# Altium PCB candy-v1.0-product.PcbDoc (part 1 of 2)
Units mil, origin at the board's own origin, x right, y up, seen from the top; angles counter-clockwise.
Board outline 3100 x 1100 mil, 4 copper layers (Layer 1, Layer 2, Layer 3, Layer 4), stack 22.378 mil thick; 96 components, 103 nets, 428 pads, 133 vias.
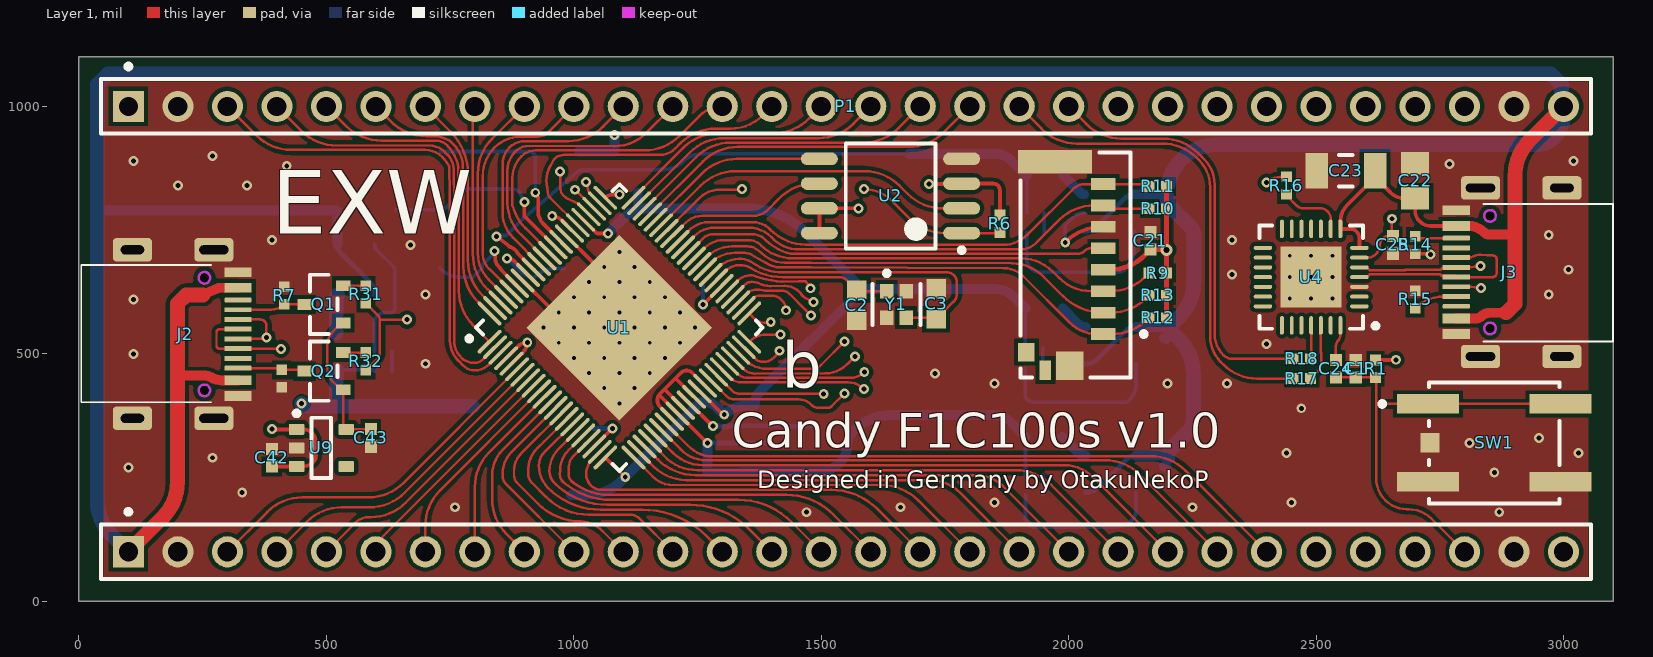
[diagram p0: Layer 1 view]
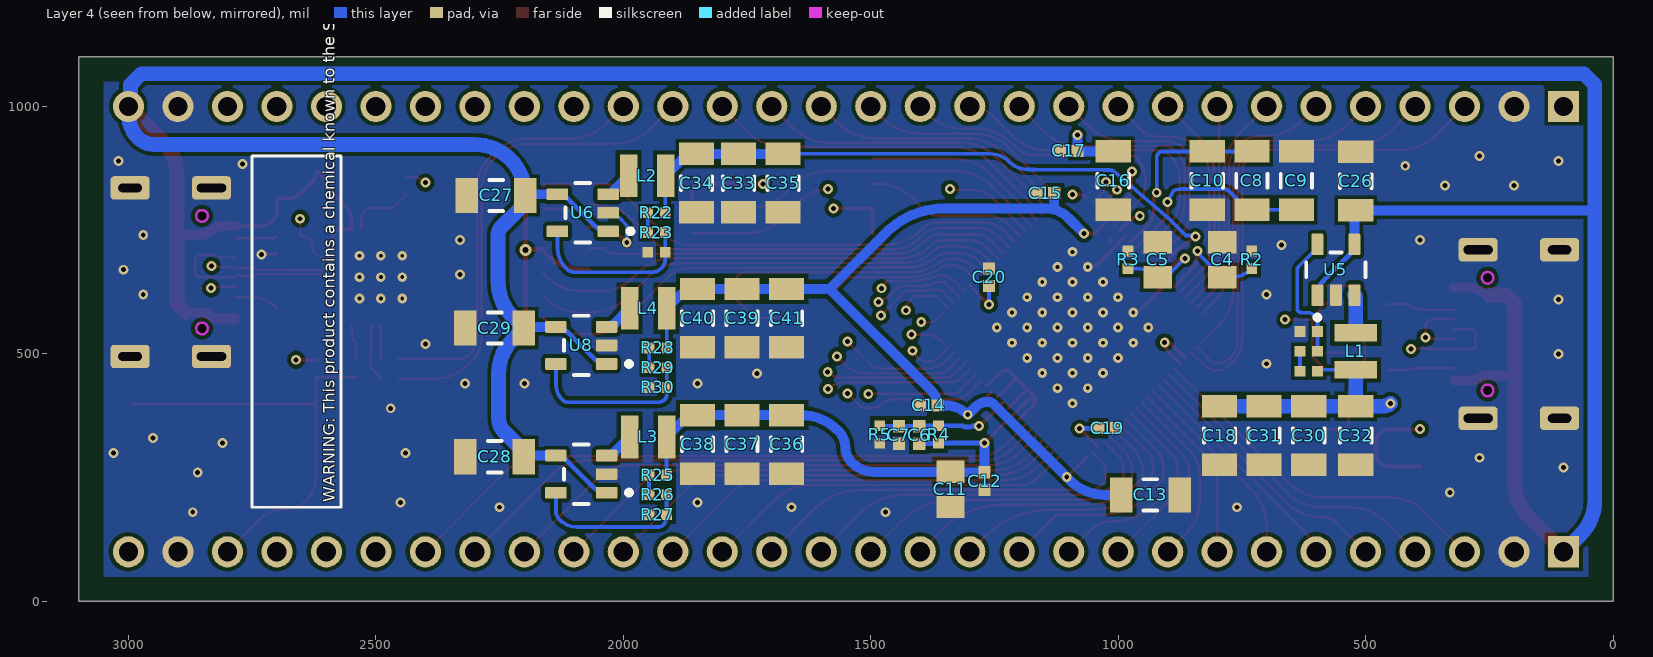
[diagram p1: Layer 4 view, seen from below]
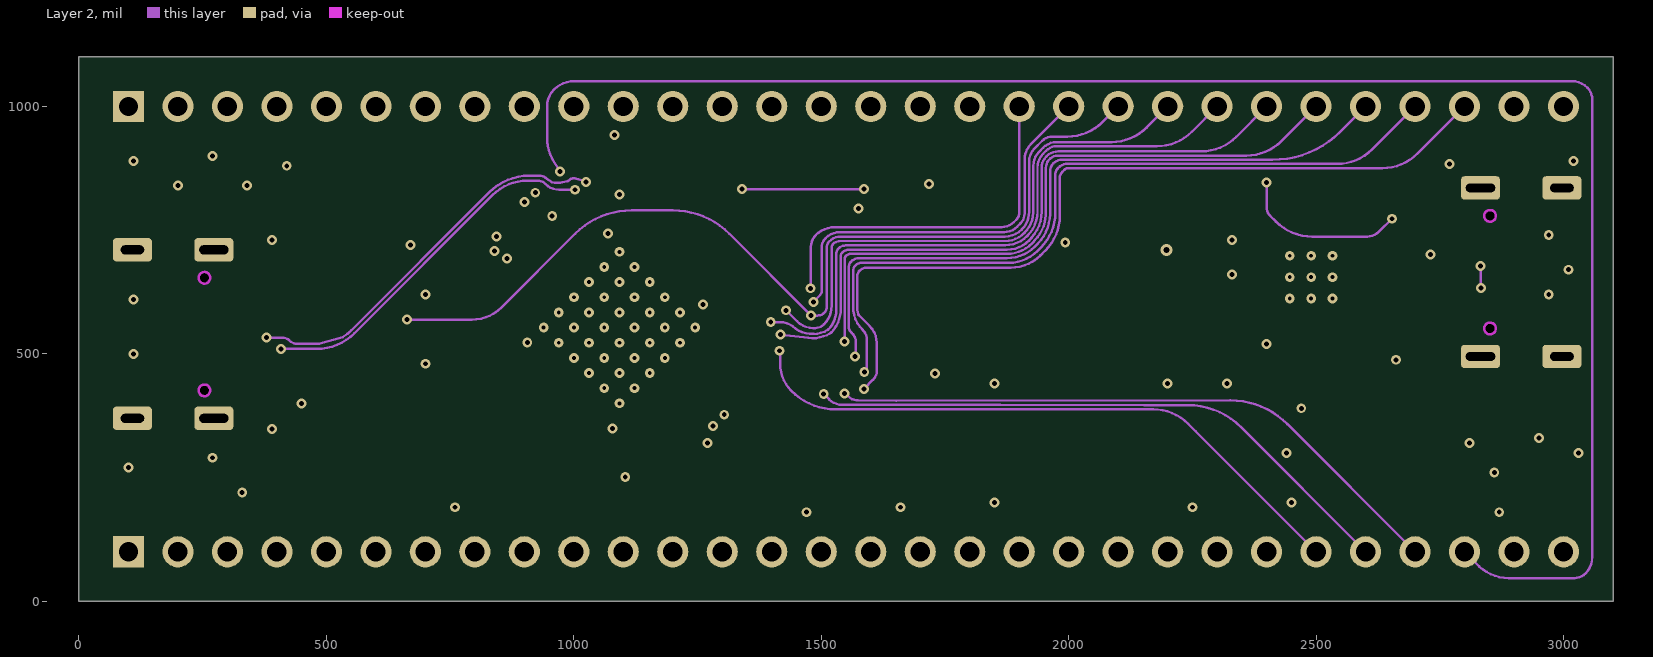
[diagram p2: Layer 2]
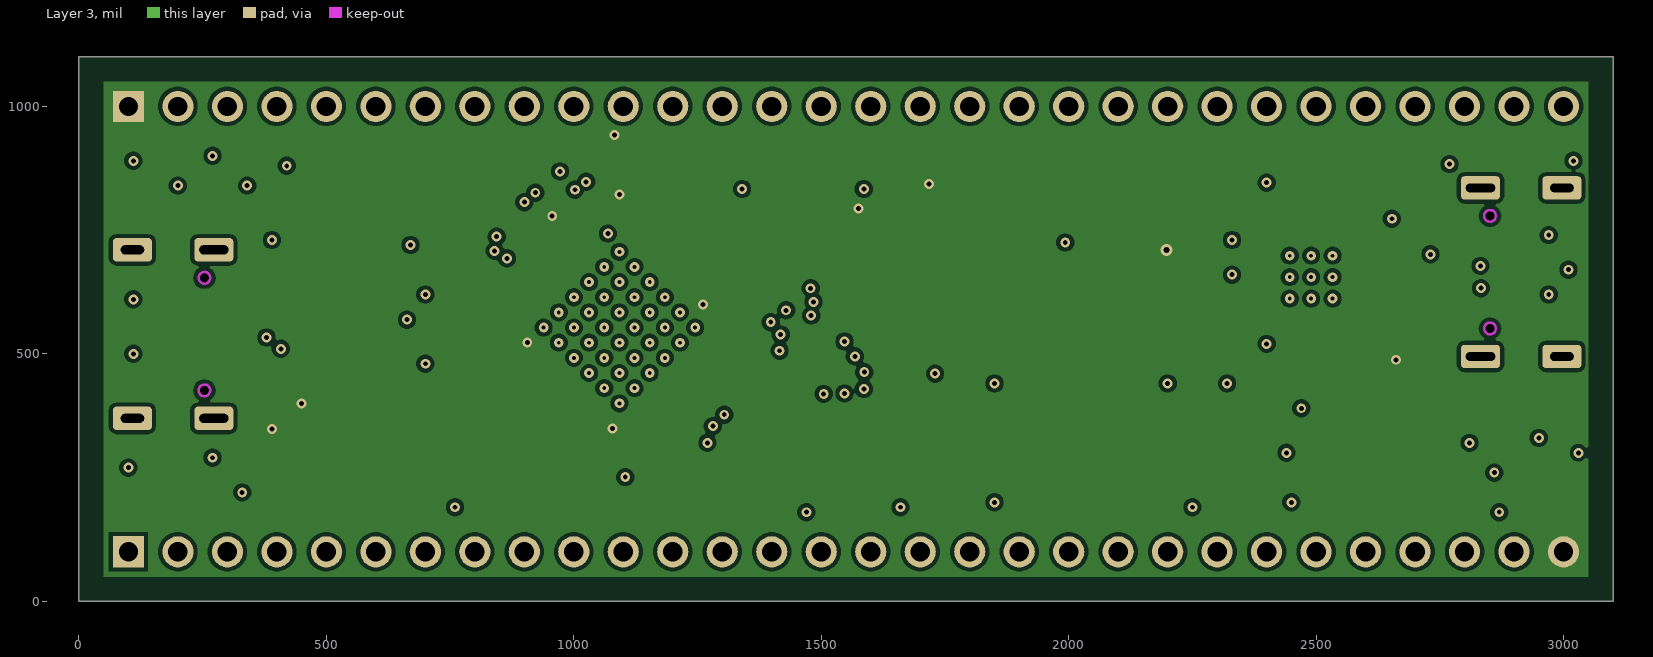
[diagram p3: Layer 3]
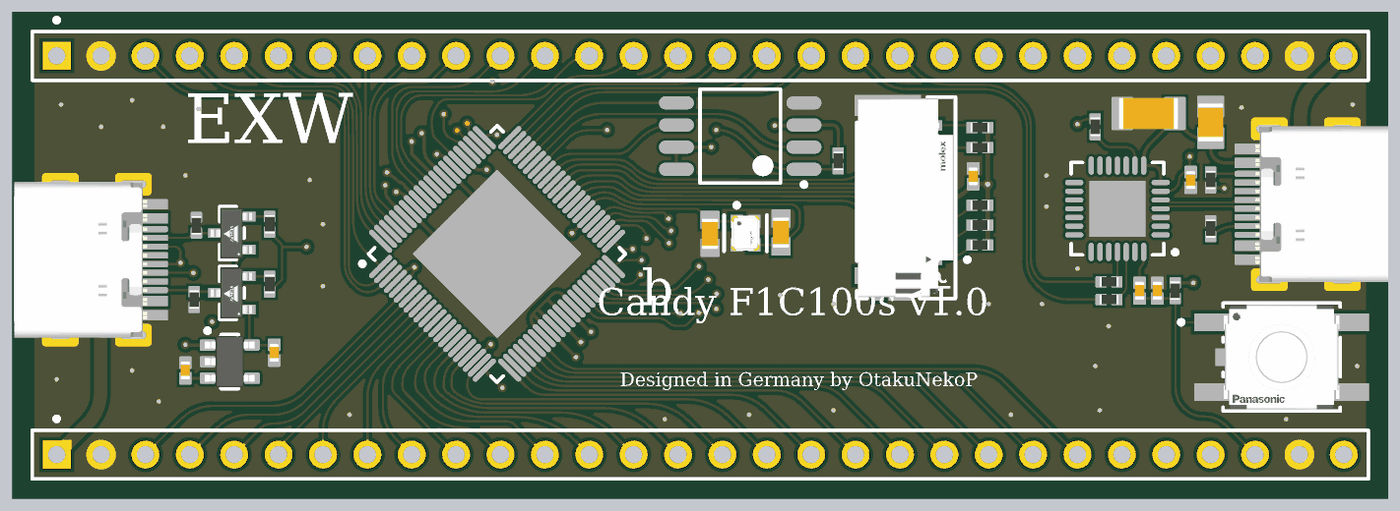
[diagram p5: 3D render of the assembled board from above, using the file's embedded part models]
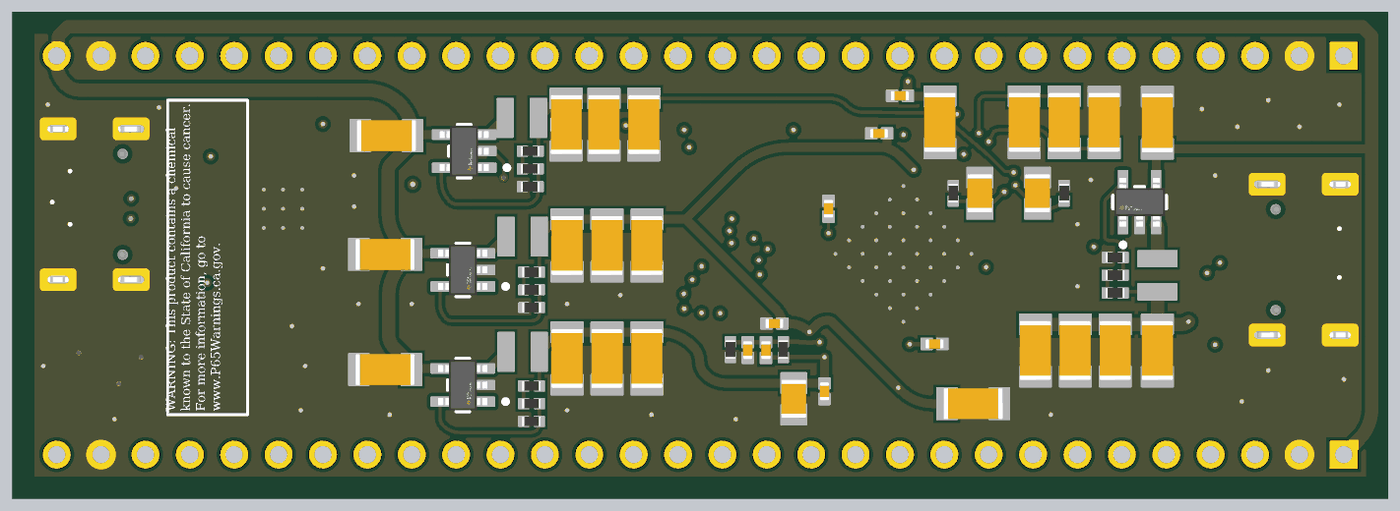
[diagram p6: 3D render of the assembled board from below, using the file's embedded part models]

## Layer stack, top to bottom
Top Solder: solder mask 0.4, Solder Resist, Dk 3.5
Layer 1: signal copper 1.4
Dielectric 2: prepreg 2.8, FR-4, Dk 4.1
Layer 2: signal copper 0.689
Dielectric 1: dielectric 12.6, FR-4, Dk 4.8
Layer 3: signal copper 0.689
Dielectric 3: prepreg 2.8, FR-4, Dk 4.1
Layer 4: signal copper 1.4
Bottom Solder: solder mask 0.4, Solder Resist, Dk 3.5

## Board outline
0,0 0,1100 3100,1100 3100,0

## Design rules (kind name [scope] priority, off if disabled: settings)
Clearance [All] p1: gap=7.87 ignorepadtopadclearanceinfootprint=TRUE except(3.5: Arc-Arc Arc-Track Track-Track; 10: Arc-Via Track-Via; 13: Arc-Hole Track-Hole SMDPad-Hole THPad-Hole Via-Hole Fill-Hole Poly-Hole Region-Hole)
DiffPairsRouting [All] p1: maxlimit=10 minlimit=3.5 mostfreqgap=10 toplayer_minwidth=3.5 toplayer_maxwidth=15 toplayer_prefwidth=15 midlayer1_minwidth=3.5 midlayer1_maxwidth=15 midlayer1_prefwidth=15 midlayer2_minwidth=3.5 midlayer2_maxwidth=15 midlayer2_prefwidth=15 bottomlayer_minwidth=3.5 bottomlayer_maxwidth=15 bottomlayer_prefwidth=15 maxuncoupledlength=500
HoleSize [All] p1: absolutevalues=TRUE maxlimit=248.03 minlimit=7.87 maxpercent=80.000 minpercent=20.000
HoleToHoleClearance [All] p1: gap=19.68 allowstackedmicrovias=TRUE
MinimumSolderMaskSliver [All] p1: minsoldermaskwidth=7.87
PasteMaskExpansion [All] p1: expansion=1.97
PlaneClearance [All] p1: clearance=7.87
PlaneConnect [All] p1: planeconnectstyle=Direct reliefexpansion=20 reliefentries=4 reliefconductorwidth=10 reliefairgap=10
PolygonConnect [All] p1: connectstyle=Direct reliefconductorwidth=10 reliefentries=4 polygonreliefangle="90 Angle" airgapwidth=10
RoutingCorners [All] p1: cornerstyle=Round minsetback=100 maxsetback=100
RoutingVias [All] p1: holewidth=10 width=20 viastyle="Through Hole" minholewidth=7.87 minwidth=15.75 maxholewidth=248.03 maxwidth=300
SilkToSilkClearance [All] p1: silktosilkclearance=0
SilkToSolderMaskClearance [IsPad] p1: minsilkscreentomaskgap=5.91 clearancetoexposedcopper=TRUE
SolderMaskExpansion [All] p1: expansion=1.97 istentingtop=FALSE
Width [All] p1: maxlimit=200 minlimit=3.5 preferedwidth=10
20 further rules are at their usual default settings.

## Classes and differential pairs
differential pair DBGUSB: +DBGUSB_P -DBGUSB_N
differential pair AWUSB: +AWUSB_P -AWUSB_N

## Components (designator, comment, footprint, x,y, rotation, side; value= is the part's Value field where it differs from the comment)
C1 "" C0402 2580,470 r90 top value=100n
C2 "" C0603 1572,598.35 r270 top value=18p
C3 "" C0603 1732,601.35 r90 top value=18p
C4 "" C0805 790,690 r90 bottom value=1u
C5 "" C0805 920,690 r90 bottom value=1u
C6 "" C0402 1402,336 r90 bottom value=100n
C7 "" C0402 1443,336 r270 bottom value=100n
C8 "" C1206 730,850 r270 bottom value=10u
C9 "" C1206 640,850 r90 bottom value=10u
C10 "" C1206 820,850 r270 bottom value=10u
C11 "" C0805 1339,226 r270 bottom value=1u
C12 "" C0402 1270,243 r270 bottom value=100n
C13 "" C1206 935,215 r180 bottom value=10u
C14 "" C0402 1383,396 r0 bottom value=100n
C15 "" C0402 1147,825 r0 bottom value=100n
C16 "" C1206 1010,850 r270 bottom value=10u
C17 "" C0402 1100,910 r0 bottom value=100n
C18 "" C1206 795,335 r270 bottom value=10u
C19 "" C0402 1022,350 r180 bottom value=100n
C20 "" C0402 1261,655 r90 bottom value=100n
C21 "" C0402 2165,728.15 r90 top value=100n
C22 "" C0805 2700,850 r90 top value=100n
C23 "" C1206 2560,870 r180 top value=4u7
C24 "" C0402 2540,470 r270 top value=100n
C25 "" C0402 2655,720 r270 top value=100n
C26 "" C1206 520,849.06 r90 bottom value=4u7
C27 "" C1206 2257,820 r0 bottom value=4u7
C28 "" C1206 2260,292 r0 bottom value=4u7
C29 "" C1206 2260,552 r0 bottom value=4u7
C30 "" C1206 615,335 r270 bottom value=10u
C31 "" C1206 705,335 r270 bottom value=10u
C32 "" C1206 520,335 r270 bottom value=10u
C33 "" C1206 1767,845 r270 bottom value=10u
C34 "" C1206 1852,845 r270 bottom value=10u
C35 "" C1206 1677,845 r270 bottom value=10u
C36 "" C1206 1670,317 r270 bottom value=10u
C37 "" C1206 1760,317 r270 bottom value=10u
C38 "" C1206 1850,317 r270 bottom value=10u
C39 "" C1206 1760,572 r270 bottom value=22u
C40 "" C1206 1850,572 r270 bottom value=22u
C41 "" C1206 1670,572 r270 bottom value=22u
C42 "" C0402 390,290 r90 top value=100n
C43 "" C0402 590,330 r270 top value=100n
J1 "" FP-47309-3351-MFG 2013.9,679.76 r270 top
J2 "" Type_C_16P 214.82,540 r180 top locked
J3 "" Type_C_16P 2890,665 r0 top locked
L1 "" INDC2520X10N 520,505 r270 bottom
L2 "" INDC2520X10N 1952,860 r180 bottom
L3 "" INDC2520X10N 1950,332 r180 bottom
L4 "" INDC2520X10N 1950,592 r180 bottom
P1 "" HDR1X30 100,1000 r0 top locked
P2 "" HDR1X30 100,100 r0 top locked
Q1 "" FP-S-03946-MFG 494.82,600 r180 top
Q2 "" FP-S-03946-MFG 494.82,465 r180 top
R1 "" R0402 2620,470 r90 top value=47k
R2 "" R0402 730,690 r270 bottom value=200k
R3 "" R0402 980,690 r270 bottom value=200k
R4 "" R0402 1363,337 r90 bottom value=2k0
R5 "" R0402 1482,337 r270 bottom value=2k0
R6 "" R0402 1861,763 r90 top value=10k
R7 "" R0402 414.82,617.72 r90 top value=5k1
R8 "" R0402 409.82,450 r270 top value=5k1
R9 "" R0402 2180,663.15 r0 top value=47k
R10 "" R0402 2180,793.15 r0 top value=47k
R11 "" R0402 2180,838.15 r0 top value=47k
R12 "" R0402 2180,573.15 r0 top value=47k
R13 "" R0402 2180,618.15 r0 top value=47k
R14 "" R0402 2700,720 r270 top value=5k1
R15 "" R0402 2700,610 r90 top value=5k1
R16 "" R0402 2440,840 r270 top value=4k7
R17 "" R0402 2471,450 r180 top value=10k
R18 "" R0402 2471,490 r180 top value=10k
R19 "" R0402 615,465 r180 bottom value=430k
R20 "" R0402 615,505 r0 bottom value=12k
R21 "" R0402 615,545 r180 bottom value=100k
R22 "" R0402 1933,785 r180 bottom value=360k
R23 "" R0402 1933,745 r0 bottom value=5k1
R24 "" R0402 1933,705 r180 bottom value=100k
R25 "" R0402 1930.28,255 r180 bottom value=300k
R26 "" R0402 1930.28,215 r0 bottom value=16k
R27 "" R0402 1930.28,175 r180 bottom value=100k
R28 "" R0402 1930,512 r180 bottom value=82k
R29 "" R0402 1930,472 r0 bottom value=1k3
R30 "" R0402 1930,432 r180 bottom value=100k
R31 "" R0402 579.82,620 r90 top value=200R
R32 "" R0402 579.82,485 r90 top value=200R
SW1 "" FP-EVQ-Q2H03W-MFG 2860,320 r0 top
U1 "" QFN40P1000X1000X90_HS-89M 1092.16,553.08 r45 top locked
U2 "" WINB-W25Q16DVSSIG-8_M 1640,819 r180 top
U4 "" SLAB-QFN-28-3125x3125TP_M 2490,655 r180 top
U5 "" FP-DBV0005A-MFG 560,670 r90 bottom
U6 "" FP-DBV0005A-MFG 2082,785 r0 bottom
U7 "" FP-DBV0005A-MFG 2085,257 r0 bottom
U8 "" FP-DBV0005A-MFG 2085,517 r0 bottom
U9 "" DBV0005A_L 490,309.82 r0 top
Y1 "" FP-XRCGB_F_N-MFG 1652,599.85 r270 top

## Footprints (in the part's own frame and the unit in brackets; to place one, negate y for a bottom-side part, rotate by r counter-clockwise, add the part's x,y. Pads: shape width x height; smd on the part's side, far side on the other; paste and mask are expansions set on the pad)
C0402 [mm]
  rect 0.62x0.62 smd: 1(-0.45,0) 2(0.45,0)
  body extent -0.53,-0.28 0.53,0.28, height 0.6
C0603 [mm]
  rect 0.95x1 smd: 1(-0.8,0) 2(0.8,0)
  body extent -0.87,-0.48 0.87,0.48, height 0.7
C0805 [mm]
  rect 1.15x1.45 smd: 1(-0.9,0) 2(0.9,0)
  body extent -1.1,-0.72 1.1,0.72, height 0.9
C1206 [mm]
  rect 1.15x1.8 smd: 1(-1.5,0) 2(1.5,0)
  silkscreen extent -0.35,-0.8 0.35,0.8, body extent -1.7,-0.9 1.7,0.9, height 1
DBV0005A_L [mm] "SOT23, 5-Leads, Body 3.05x1.75mm, Pitch 0.95mm, IPC High Density"
  rrect18% 0.8x0.55 smd: 1(-1.275,0.95) 2(-1.275,0) 3(-1.275,-0.95) 4(1.275,-0.95) 5(1.275,0.95)
  silkscreen extent -1.4,-1.55 0.5,1.9, body extent -1.42,-1.46 1.42,1.46, height 1.08
FP-47309-3351-MFG [mm]
  rect 1.2x3.79 smd paste+0 mask+0: G1(-5.3,-1.055)
  rect 1.45x1.4 smd paste+0 mask+0: G2(5.175,-0.3)
  rect 1x0.6 smd paste+0 mask+0: G3(5.4,-1.55)
  rect 0.95x0.85 smd paste+0 mask+0: G4(4.475,-2.525)
  rect 0.6x1.25 smd paste+0 mask+0: P1(3.55,1.425) P2(2.45,1.425) P3(1.35,1.425) P4(0.25,1.425) P5(-0.85,1.425) P6(-1.95,1.425) P7(-3.05,1.425) P8(-4.15,1.425)
  silkscreen extent -5.77,-2.83 5.77,3.63, body extent -6,-3.05 6,2.93, height 0.25
FP-DBV0005A-MFG [mm]
  rrect17% 1.1x0.6 smd paste+0 mask+0: 1(-1.3,0.95) 2(-1.3,0) 3(-1.3,-0.95) 4(1.3,-0.95) 5(1.3,0.95)
  silkscreen extent -2.57,-1.53 0.87,1.53, body extent -1.4,-1.45 1.4,1.45, height 1.45
FP-EVQ-Q2H03W-MFG [mm]
  rect 1x1 smd paste+0 mask+0: 1(-3.3,0)
  rect 3.2x1 smd paste+0 mask+0: A(-3.4,2) A'(3.4,2) B(-3.4,-2) B'(3.4,-2)
  silkscreen extent -5.87,-3.1 3.35,3.1, body extent -5.1,-3.2 5.1,3.2, height 0.25
FP-S-03946-MFG [mil]
  rect 29x22 smd paste+0 mask+0: 1(-39,37.5) 2(-39,-37.5) 3(39,0)
  silkscreen extent -28,-60 28,60, body extent -57,-64 57,64, height 10
FP-XRCGB_F_N-MFG [mm]
  rect 0.75x0.7 smd paste+0 mask+0: 1(-0.675,-0.5) 2(0.675,-0.5) 3(0.675,0.5) 4(-0.675,0.5)
  silkscreen extent -1.72,-1.22 1.05,1.22, body extent -1.15,-0.95 1.15,0.95, height 0.25
HDR1X30 [mm] "Connector; Header; 30 Position"
  rect 1.6x1.6 hole 0.99: 1(0,0)
  round 1.6 hole 0.99: 2(2.54,0) 3(5.08,0) 4(7.62,0) 5(10.16,0) 6(12.7,0) 7(15.24,0) 8(17.78,0) 9(20.32,0) 10(22.86,0) 11(25.4,0) 12(27.94,0) 13(30.48,0) 14(33.02,0) 15(35.56,0) 16(38.1,0) 17(40.64,0) 18(43.18,0) 19(45.72,0) 20(48.26,0) 21(50.8,0) 22(53.34,0) 23(55.88,0) 24(58.42,0) 25(60.96,0) 26(63.5,0) 27(66.04,0) 28(68.58,0) 29(71.12,0) 30(73.66,0)
  silkscreen extent -1.4,-1.4 75.06,2.17
INDC2520X10N [mm] "Chip Inductor, 2-Leads, Body 2.50x2.00mm, IPC Medium Density"
  rect 0.9x2.2 smd: 1(-0.95,0) 2(0.95,0)
  body extent -1.35,-1.1 1.35,1.1, height 1
QFN40P1000X1000X90_HS-89M [mm] "QFN, 88-Leads, Body 10.00x10.00mm, Pitch 0.40mm, Thermal Pad 6.74x6.74mm, IPC Low Density"
  oval 1.65x0.2 smd: 1(-5.225,4.2) 2(-5.225,3.8) 3(-5.225,3.4) 4(-5.225,3) 5(-5.225,2.6) 6(-5.225,2.2) 7(-5.225,1.8) 8(-5.225,1.4) 9(-5.225,1) 10(-5.225,0.6) 11(-5.225,0.2) 12(-5.225,-0.2) 13(-5.225,-0.6) 14(-5.225,-1) 15(-5.225,-1.4) 16(-5.225,-1.8) 17(-5.225,-2.2) 18(-5.225,-2.6) 19(-5.225,-3) 20(-5.225,-3.4) 21(-5.225,-3.8) 22(-5.225,-4.2) 45(5.225,-4.2) 46(5.225,-3.8) 47(5.225,-3.4) 48(5.225,-3) 49(5.225,-2.6) 50(5.225,-2.2) 51(5.225,-1.8) 52(5.225,-1.4) 53(5.225,-1) 54(5.225,-0.6) 55(5.225,-0.2) 56(5.225,0.2) 57(5.225,0.6) 58(5.225,1) 59(5.225,1.4) 60(5.225,1.8) 61(5.225,2.2) 62(5.225,2.6) 63(5.225,3) 64(5.225,3.4) 65(5.225,3.8) 66(5.225,4.2)
  oval 0.2x1.65 smd: 23(-4.2,-5.225) 24(-3.8,-5.225) 25(-3.4,-5.225) 26(-3,-5.225) 27(-2.6,-5.225) 28(-2.2,-5.225) 29(-1.8,-5.225) 30(-1.4,-5.225) 31(-1,-5.225) 32(-0.6,-5.225) 33(-0.2,-5.225) 34(0.2,-5.225) 35(0.6,-5.225) 36(1,-5.225) 37(1.4,-5.225) 38(1.8,-5.225) 39(2.2,-5.225) 40(2.6,-5.225) 41(3,-5.225) 42(3.4,-5.225) 43(3.8,-5.225) 44(4.2,-5.225) 67(4.2,5.225) 68(3.8,5.225) 69(3.4,5.225) 70(3,5.225) 71(2.6,5.225) 72(2.2,5.225) 73(1.8,5.225) 74(1.4,5.225) 75(1,5.225) 76(0.6,5.225) 77(0.2,5.225) 78(-0.2,5.225) 79(-0.6,5.225) 80(-1,5.225) 81(-1.4,5.225) 82(-1.8,5.225) 83(-2.2,5.225) 84(-2.6,5.225) 85(-3,5.225) 86(-3.4,5.225) 87(-3.8,5.225) 88(-4.2,5.225)
  rect 6.74x6.74 smd: 89(0,0)
  silkscreen extent -5.97,-5.2 5.2,5.2, body extent -5.05,-5.05 5.05,5.05, height 0.9
R0402 [mm]
  rect 0.55x0.55 smd: 1(-0.45,0) 2(0.45,0)
  body extent -0.53,-0.28 0.53,0.28, height 0.4
SLAB-QFN-28-3125x3125TP_M [mm] "QFN, 28-Leads, Body 5x5mm, Pitch 0.5mm, Thermal Pad 3.13x3.13mm, IPC Low Density"
  oval 0.95x0.2 smd: 1(-2.475,1.5) 2(-2.475,1) 3(-2.475,0.5) 4(-2.475,0) 5(-2.475,-0.5) 6(-2.475,-1) 7(-2.475,-1.5) 15(2.475,-1.5) 16(2.475,-1) 17(2.475,-0.5) 18(2.475,0) 19(2.475,0.5) 20(2.475,1) 21(2.475,1.5)
  oval 0.2x0.95 smd: 8(-1.5,-2.475) 9(-1,-2.475) 10(-0.5,-2.475) 11(0,-2.475) 12(0.5,-2.475) 13(1,-2.475) 14(1.5,-2.475) 22(1.5,2.475) 23(1,2.475) 24(0.5,2.475) 25(0,2.475) 26(-0.5,2.475) 27(-1,2.475) 28(-1.5,2.475)
  rect 3.13x3.13 smd: 29(0,0)
  silkscreen extent -3.42,-2.65 2.65,2.65, body extent -2.5,-2.5 2.5,2.5, height 1
Type_C_16P [mm]
  rrect30% 2x1.2 hole 0.45 slot 1.5 at 0 deg: 0(-1.47,4.325) 0(-1.47,-4.325)
  rrect30% 2x1.2 hole 0.45 slot 1.2 at 0 deg: 0(2.71,4.325) 0(2.71,-4.325)
  rect 1.397x0.5 smd: A1B12(-2.71,-3.175) A4B9(-2.71,-2.375) A9B4(-2.71,2.375) A12B1(-2.71,3.175)
  rect 1.397x0.25 smd: A5(-2.71,-1.25) A6(-2.71,-0.25) A7(-2.71,0.25) A8(-2.71,1.25) B6(-2.71,0.75) B7(-2.71,-0.75)
  rrect50% 1.397x0.25 smd: B5(-2.71,1.75) B8(-2.71,-1.75)
  Keep-Out Layer board cut-out: -0.983,-2.587 -1.098,-2.61 -1.195,-2.675 -1.26,-2.773 -1.283,-2.887 -1.283,-2.887 -1.26,-3.002 -1.195,-3.1 -1.098,-3.165 -0.983,-3.187 -0.983,-3.187 -0.868,-3.165 -0.771,-3.1 -0.706,-3.002 -0.683,-2.887 -0.683,-2.887 -0.706,-2.773 -0.771,-2.675 -0.868,-2.61 -0.983,-2.587
  Keep-Out Layer board cut-out: -0.983,3.19 -1.098,3.168 -1.195,3.103 -1.26,3.005 -1.283,2.89 -1.283,2.89 -1.26,2.776 -1.195,2.678 -1.098,2.613 -0.983,2.59 -0.983,2.59 -0.868,2.613 -0.771,2.678 -0.706,2.776 -0.683,2.89 -0.683,2.89 -0.706,3.005 -0.771,3.103 -0.868,3.168 -0.983,3.19
  Keep-Out Layer circle w0.127: c-0.983,2.89 r0.3
  Keep-Out Layer circle w0.127: c-0.983,-2.887 r0.3
  silkscreen extent -1.33,-3.55 5.34,3.5, body extent -2.27,-4.47 5.33,4.47, height 3.28
WINB-W25Q16DVSSIG-8_M [mm] "SOIC, 8-Leads, Body 5.4x5.4mm, Pitch 1.27mm, IPC Low Density"
  oval 1.9x0.65 smd: 1(-3.65,1.905) 2(-3.65,0.635) 3(-3.65,-0.635) 4(-3.65,-1.905) 5(3.65,-1.905) 6(3.65,-0.635) 7(3.65,0.635) 8(3.65,1.905)
  silkscreen extent -3.78,-2.7 2.3,2.9, body extent -2.7,-2.7 2.7,2.7, height 2.16

## Part data
C1 C6 C7 C12 C14 C15 C17 C19 C20 C21 C24 C25 C42 C43: library part CMP-003-0006-1, "C0402_100n", Dielectric=X7R, Manufacturer 1=Kemet, Manufacturer Part Number 1=C0402C104K4RACTU, Tolerance=0.1%, Voltage Rating DC=16V, Component Type=Standard, Part Number=C0402_100n, Pin Count=2
C2 C3: library part CMP-003-0024-1, "C0603_18p", Dielectric=C0G, Hidden Value=C180, Manufacturer 1=Kemet, Manufacturer Part Number 1=C0603C180J1GAC, Tolerance=0.05%, Voltage Rating DC=100V, Component Type=Standard, Part Number=C0603_18p, Pin Count=2
C4 C5 C11: library part CMP-003-0085-1, "C0805_1u", Dielectric=X7R, Hidden Value=C105, Manufacturer 1=Kemet, Manufacturer Part Number 1=C0805C105K3RAC, Tolerance=0.1%, Voltage Rating DC=25V, Component Type=Standard, Part Number=C0805_1u, Pin Count=2
C8 C9 C10 C13 C16 C18 C30 C31 C32 C33 C34 C35 C36 C37 C38: library part CMP-003-0097-1, "C1206_10u", Dielectric=X7R, Hidden Value=C106, Manufacturer 1=Kemet, Manufacturer Part Number 1=C1206C106K4RAC, Tolerance=0.1%, Voltage Rating DC=16V, Component Type=Standard, Part Number=C1206_10u, Pin Count=2
C22: library part CMP-003-0073-1, "C0805_100n", Dielectric=X7R, Hidden Value=C104, Manufacturer 1=Kemet, Manufacturer Part Number 1=C0805C104K3RAC, Tolerance=0.1%, Voltage Rating DC=25V, Component Type=Standard, Part Number=C0805_100n, Pin Count=2
C23 C26 C27 C28 C29: library part CMP-003-0093-1, "C1206_4u7", Dielectric=X7R, Hidden Value=C475, Manufacturer 1=Kemet, Manufacturer Part Number 1=C1206C475K4RAC, Tolerance=0.1%, Voltage Rating DC=16V, Component Type=Standard, Part Number=C1206_4u7, Pin Count=2
C39 C40 C41: library part CMP-003-0098-1, "C1206_22u", Dielectric=X5R, Hidden Value=C226, Manufacturer 1=Kemet, Manufacturer Part Number 1=C1206C226M8PAC, Tolerance=0.2%, Voltage Rating DC=10V, Component Type=Standard, Part Number=C1206_22u, Pin Count=2
J1: library part CMP-011-000000-2, "CONN MICRO SD CARD PUSH-PULL R/A", Current Rating=500mA, Insulation Resistance=100MR, Max Operating Temperature=85°C, Min Operating Temperature=-40°C, Package Quantity=4200, Voltage Rating (DC)=5V, Connector Type=Socket, Contact Material=Bronze, Contact Plating=Gold, Depth=3.35mm, Design Item ID=CMP-04763-000007-1, Gender=Female, Halogen Free="Low Halogen", Housing Material=Thermoplastic, Length=11.4mm, Mount="Surface Mount", Number of Circuits=8, Number of Contacts=8, Number of Rows=1, Orientation="Right Angle", Packaging="Tape and Reel", Pitch=1.1mm, Radiation Hardening=No, RoHS Compliant=Yes, Series=47309, Source=sdcard.SchLib, Termination=SMD/SMT, Width=5.5mm
J2 J3: library part Type_C_16P
L1 L2 L3 L4: library part CMP-00003-2, "Fixed Ind 2.2UH 2.5A 97 Mohm SMD"
P1 P2: library part "Header 30", "Header, 30-Pin", LatestRevisionDate=17-Jul-2002, LatestRevisionNote="Re-released for DXP Platform.", Publisher="Altium Limited"
Q1 Q2: library part CMP-02550-000015-1, "MOSFET N-CH 40V 3A SOT23-3", Continuous Drain Current=3A, Drain To Source Breakdown Voltage=40V, Drain To Source Resistance=0.036Ω, Gate To Source Voltage=20V, Input Capacitace At Vds="540pF @ 20V", Manufacturer=Vishay, Manufacturer Part Number=SI2318DS-T1-E3, Max Forward Diode Voltage=1.2V, Max Junction Temp=+150°C, Package=S-03946, Power Dissipation=0.75W, Pulse Drain Current=16A, Temperature="-55°C to +150°C", Temperature Range Low=-55°C, Typ Forward Diode Voltage=0.8V, Automotive=No, Category=Trans, ComponentLink2Description=Datasheet, ComponentLink2URL=http://www.vishay.com/docs/72322/72322.pdf, Depletion Mode=False, Device Class L1="Discrete Semiconductors", Device Class L2=Transistors, Device Class L3=MOSFETs, Digikey Description="MOSFET N-CH 40V 3A SOT23-3", Drain To Source Voltage=40V, Gate Charge At Vgs="10nC @ 10V", Height=1.12mm, Lead Free=Yes, Mouser Description="MOSFET 40V 6A", Number Of Channels=1, Number Of N Channels=1, Octopart=https://octopart.com/si2318ds-t1-e3-vishay-40866469, RoHS=TRUE, Rthja Max=120°C/W, Standoff Height=0.01mm, Temperature Range High=+150°C, Threshold Vgs Max=3V, Threshold Vgs Min=1V, Transconductance=11S, Turn Off Delay Time=20ns, Turn On Delay Time=5ns
R1 R9 R10 R11 R12 R13: library part CMP-004-0459-1, "R0402_47k", Manufacturer 1=Vishay, Manufacturer Part Number 1=CRCW040247K0FKED, Power Rating=62,5mW, Tolerance=1%, Component Type=Standard, Part Number=R0402_47k, Pin Count=2
R2 R3: library part CMP-004-0474-1, "R0402_200k", Manufacturer 1=Vishay, Manufacturer Part Number 1=CRCW0402200KFKED, Power Rating=62,5mW, Tolerance=1%, Component Type=Standard, Part Number=R0402_200k, Pin Count=2
R4 R5: library part CMP-004-0426-1, "R0402_2k0", Manufacturer 1=Vishay, Manufacturer Part Number 1=CRCW04022K00FKED, Power Rating=62,5mW, Tolerance=1%, Component Type=Standard, Part Number=R0402_2k0, Pin Count=2
R6 R17 R18: library part CMP-004-0443-1, "R0402_10k", Manufacturer 1=Vishay, Manufacturer Part Number 1=CRCW040210K0FKED, Power Rating=62,5mW, Tolerance=1%, Component Type=Standard, Part Number=R0402_10k, Pin Count=2
R7 R8 R14 R15 R23: library part CMP-004-0436-1, "R0402_5k1", Manufacturer 1=Vishay, Manufacturer Part Number 1=CRCW04025K10FKED, Power Rating=62,5mW, Tolerance=1%, Component Type=Standard, Part Number=R0402_5k1, Pin Count=2
R16: library part CMP-004-0435-1, "R0402_4k7", Manufacturer 1=Vishay, Manufacturer Part Number 1=CRCW04024K70FKED, Power Rating=62,5mW, Tolerance=1%, Component Type=Standard, Part Number=R0402_4k7, Pin Count=2
R19: library part CMP-004-0482-1, "R0402_430k", Manufacturer 1=Vishay, Manufacturer Part Number 1=CRCW0402430KFKED, Power Rating=62,5mW, Tolerance=1%, Component Type=Standard, Part Number=R0402_430k, Pin Count=2
R20: library part CMP-004-0445-1, "R0402_12k", Manufacturer 1=Vishay, Manufacturer Part Number 1=CRCW040212K0FKED, Power Rating=62,5mW, Tolerance=1%, Component Type=Standard, Part Number=R0402_12k, Pin Count=2
R21 R24 R27 R30: library part CMP-004-0467-1, "R0402_100k", Manufacturer 1=Vishay, Manufacturer Part Number 1=CRCW0402100KFKED, Power Rating=62,5mW, Tolerance=1%, Component Type=Standard, Part Number=R0402_100k, Pin Count=2
R22: library part CMP-004-0480-1, "R0402_360k", Manufacturer 1=Vishay, Manufacturer Part Number 1=CRCW0402360KFKED, Power Rating=62,5mW, Tolerance=1%, Component Type=Standard, Part Number=R0402_360k, Pin Count=2
R25: library part CMP-004-0478-1, "R0402_300k", Manufacturer 1=Vishay, Manufacturer Part Number 1=CRCW0402300KFKED, Power Rating=62,5mW, Tolerance=1%, Component Type=Standard, Part Number=R0402_300k, Pin Count=2
R26: library part CMP-004-0448-1, "R0402_16k", Manufacturer 1=Vishay, Manufacturer Part Number 1=CRCW040216K0FKED, Power Rating=62,5mW, Tolerance=1%, Component Type=Standard, Part Number=R0402_16k, Pin Count=2
R28: library part CMP-004-0465-1, "R0402_82k", Manufacturer 1=Vishay, Manufacturer Part Number 1=CRCW040282K0FKED, Power Rating=62,5mW, Tolerance=1%, Component Type=Standard, Part Number=R0402_82k, Pin Count=2
R29: library part CMP-004-0422-1, "R0402_1k3", Manufacturer 1=Vishay, Manufacturer Part Number 1=CRCW04021K30FKED, Power Rating=62,5mW, Tolerance=1%, Component Type=Standard, Part Number=R0402_1k3, Pin Count=2
R31 R32: library part CMP-004-0402-1, "R0402_200R", Manufacturer 1=Vishay, Manufacturer Part Number 1=CRCW0402200RFKED, Power Rating=62,5mW, Tolerance=1%, Component Type=Standard, Part Number=R0402_200R, Pin Count=2
SW1: library part CMP-05618-000002-1, "SWITCH TACTILE SPST-NO 0.02A 15V", Contact Current Rating=20mA, Contact Resistance=100mΩ, Manufacturer="Panasonic Electronic Components", Manufacturer Part Number=EVQ-Q2H03W, Operating Force=1N, Package=0, Temperature="-40°C to +85°C", Temperature Range High=+85°C, Temperature Range Low=-40°C, Voltage Rating DC=15V, Automotive=No, Category=Switch, ComponentLink2Description=Datasheet, ComponentLink2URL=https://industrial.panasonic.com/ac/cdn/e/control/switch/light-touch/catalog/sw_lt_eng_6s_th.pdf, Device Class L1=Electromechanical, Device Class L2=Switches, Device Class L3="Tactile Switches", Digikey Description="SWITCH TACTILE SPST-NO 0.02A 15V", Electromechanical Life=1000000Cycles, Height=3.3mm, Lead Free=Yes, Mount="Surface Mount", Mouser Description="Switch Tactile ON OFF SPST Round Button J-Bend 0.02A 15VDC 1N SMD Embossed T/R", Octopart=https://octopart.com/evq-q2h03w-panasonic-1368538, RoHS=TRUE, Throw Configuration=SPST-NO
U1: library part CMP-00002-1, "Allwinner F1c100s QFN-88"
U2: library part CMP-2000-05434-1, "IC FLASH 16MBIT 104MHZ 8SOIC", Manufacturer=Winbond, Operating Supply Voltage (Max)=3.6V, Operating Supply Voltage (Min)=2.7V, Operating Supply Voltage (Typ)=3/3.3V, Operating Temp Range=-40Cto85C, Operating Temperature (Max)=85C, Operating Temperature (Min)=-40C, Operating Temperature Classification=Industrial, Package Type=SOICW, Program/Erase Volt (Typ)=2.7to3.6V, Supply Current=18mA, Access Time (Max)=7ns, Address Bus=24b, Boot Type=Bottom/Top, Cell Type=NOR, Datasheet URL=https://ciiva.com/datasheet-click-14728450?src=ciiva&sig=bd4f4644, Datasheet Version="Rev. D, 10/2012", Density=16777216Bit, Interface Type=Serial(SPI), Manufacturer URL=http://www.winbond.com/hq/index.html?__locale=en, Mounting=SurfaceMount, Number of Words=2M, Pin Count=8, Programmable=Yes, Rad Hardened=No, Sync/Async=Synchronous, Word Size=8b
U4: library part CMP-2000-04924-1, "Single-Chip USB to URAT Bridge, 3.3 V, -40 to 85 degC, 28-Pin QFN, RoHS, Tape and Reel", Manufacturer="Silicon Labs", Operating Supply Voltage (Max)=3.6V, Operating Supply Voltage (Min)=3V, Operating Supply Voltage (Typ)=3.3V, Operating Temperature (Max)=85C, Operating Temperature (Min)=-40C, Operating Temperature Classification=Industrial, Package Description="28-Pin Quad-Flat No-Leads Package, Body 5 x 5 mm, Pitch 0.5 mm", Package Reference=QFN-28, Package Type=QFNEP, Supply Current=26mA, Data Rate=1000kbps, Datasheet URL=http://www.mouser.com/ds/2/368/CP2102-9-247052.pdf, Datasheet Version="Rev. 1.6, 12/2013", Interface Circuit Standard 1=RS-232, Manufacturer URL=http://www.silabs.com/, Mounting=SurfaceMount, Number Of Channels=1, Package URL=http://www.silabs.com/Support%20Documents/TechnicalDocs/C8051T61x.pdf, Packaging=TapeandReel, Pin Count=28, Rad Hardened=No, Transmitter and Receiver FIFO Counter=No
U5 U6 U7 U8: library part CMP-04918-000387-1, "IC REG BUCK ADJ 2A SOT23-5", Case/Package=SOT-23-5, Max Input Voltage=5.5V, Max Operating Temperature=125°C, Min Input Voltage=2.5V, Min Operating Temperature=-40°C, Min Output Voltage=600mV, Output Current=2A, Switching Frequency=1.5MHz, Max Output Voltage=5.5V, Mount="Surface Mount", Output Configuration=Positive, Output Type=Adjustable, Packaging="Cut Tape", RoHS Compliant=Yes, Synchronous Rectifier=Yes
U9: library part CMP-0394-00587-2, "Single Output Low Input Voltage Requirement LDO, 150 mA, Fixed 1.8 V Output, 1.8 to 5.5 V Input, with Low IQ, 5-pin SOT-23 (DBV), -40 to 125 degC, Green (RoHS & no Sb/Br)", Manufacturer="Texas Instruments", PartNumber=TPS72118DBVT, Accuracy(%)=3, Code_JEDEC=MO-178, ComponentLink1Description="Manufacturer URL", ComponentLink1URL=http://www.ti.com/, ComponentLink2Description=Datasheet, ComponentLink2URL=http://www.ti.com/general/docs/lit/getliterature.tsp?genericPartNumber=TPS72118&fileType=pdf, ComponentLink3Description="Package Specification", ComponentLink3URL=http://www.ti.com/litv/pdf/mpds018i, DatasheetVersion=SLVS352C, Eco-Plan="Green (RoHS & no Sb/Br)", Fixed Output Options(V)=1.8, Iout(Max)(A)=0.1, Iq(Typ)(mA)=0.57, Mounting Technology="Surface Mount", PackageDescription="5-Pin Plastic Small Outline, Body 1.60 Ãƒâ€” 2.90 mm, Pitch 0.95 mm", PackageReference=DBV0005A, PackageVersion=4073253-4/K, SubFamily="Single Channel LDO", Vdo(Typ)(mV)=150, Vin(Max)(V)=5.5, Vin(Min)(V)=1.8, Vout Adj(Max)(V)=1.8, Vout Adj(Min)(V)=1.8
Y1: library part CMP-06054-000017-1, "CRYSTAL 24.0000MHZ 6PF SMD", Case/Package=SMD/SMT, ESR (Equivalent Series Resistance)=150R, Frequency=24MHz, Frequency Stability=40ppm, Frequency Tolerance=30ppm, Load Capacitance=6pF, Max Operating Temperature=85°C, Min Operating Temperature=-30°C, Operating Frequency="24 MHz", Package Quantity=1, Depth=1.6mm, Height=0.028inch, Lead Free="Lead Free", Length=2mm, Mount="Surface Mount", Number of Pins=4, Packaging="Tape and Reel", REACH SVHC="No SVHC", RoHS Compliant=Yes, Series=XRCGB, Series Resistance=150R, Termination=SMD/SMT, Tolerance=30ppm, Width=1.6mm

## Via types
v1: diameter 20, hole 10, Layer 1 to Layer 4, tented both sides, 87 vias
v2: diameter 19.68, hole 7.87, Layer 1 to Layer 4, tented both sides, 45 vias
v3: diameter 24, hole 12, Layer 1 to Layer 4, tented both sides, 1 vias

## Nets (pads, with @x,y where several pads share a name; then routed paths per layer and width w, separated by ;. In a path a pad name is that pad's centre, name@x,y a point inside that pad or via, vN(x,y) a via of type N, cw(c..) or ccw(c..) an arc to the next point about the centre after c; other vN are vias at no path point)
1V1: C13.1 C14.1 C15.1 C39.1 C40.1 C41.1 L4.2 R28.2 U1.22 U1.35 U1.71 | length 2019.5
  Layer 1 w7.5: U1.71@1019.08,770.92 1039.27,750.73 1045.8,744.51 ccw(c1049.77,748.45) 1048.12,743.11 1068.89,743.11 v1(1069,743) v1@1068.5,742.5 ; U1.22@1063.63,290.7 1102.84,251.48 ccw(c1104,252.64) v1(1104,251) ; U1.35@1254.32,424.32 1299.98,378.67 ccw(c1304,382.69) v1(1304,377)
  Layer 4 w7.5: R28.2@1912.28,512 1912.28,591.68 L4.2@1912.6,592
  Layer 4 w20: C13.1@994.06,215 1026.58,215 ccw(c1026.58,315) 1097.29,244.29 v1(1104,251) 1251.76,398.76 cw(c1262,388.51) 1262,403 1264,403 cw(c1264,369.2) 1287.9,393.1 v1(1304,377) cw(c1349.87,331.13) 1349.87,396 C14.1@1365.28,396 cw(c1407.01,396) 1377.5,425.5 1583.06,631.06 ; v1(1069,743) 1100.9,774.9 cw(c1147,728.8) 1128.88,791.43 ; C15.1@1129.28,825 1129.28,792.42 cw(c1127.89,792.42) 1128.88,791.43 ; L4.2@1912.6,592 1890.19,614.41 ccw(c1850,574.22) C40.1@1850,631.06 C39.1@1760,631.06 C41.1@1670,631.06 1583.06,631.06 ; 1128.88,791.43 cw(c1147,728.8) 1147,794 1350.13,794 cw(c1350.13,625.06) 1469.59,744.52 1583.06,631.06
1V8: C43.1 Q1.1 Q2.1 U9.5 | length 293.6
  Layer 1 w5: Q1.1@533.82,562.5 ccw(c533.82,554.48) 528.15,560.15 514,546 ccw(c542.97,517.03) 502,517.03 502,471 ccw(c540.63,471) 513.31,443.69 526.44,430.56 ccw(c533.82,437.93) Q2.1@533.82,427.5 533.82,362.61 ccw(c555.59,362.61) U9.5@540.2,347.22 588.8,347.22 ccw(c588.8,348.91) C43.1@590,347.72
2V5: C6.1 C11.1 C12.1 C36.1 C37.1 C38.1 L3.2 R4.1 R25.2 U1.30 U1.31 U1.32 U1.34 U1.36 | length 1407.4
  Layer 1 w7.5: 1173.09,416.47 U1.31@1209.78,379.78 1269.56,320 v1(1270,320) ; U1.30@1198.64,368.64 1173.48,393.81 1173.16,394.13 cw(c1188.09,406.16) 1174.53,419.71 1183.33,428.5 ; 1206.14,450.23 U1.34@1243.19,413.19 ; U1.32@1220.92,390.92 1183.33,428.5 ; U1.36@1265.46,435.46 1239.22,461.7 ccw(c1227.87,450.19) 1216.44,461.62 1183.33,428.5
  Layer 4 w7.5: C11.1@1332.28,260.72 C11.1@1332.57,261 ; R25.2@1912.57,255 L3.2@1912.6,332
  Layer 4 w10: v1(1270,320) 1361.27,320 cw(c1361.27,317.55) R4.1@1363,319.28 1399.59,319.28 cw(c1399.59,315.87) C6.1@1402,318.28
  Layer 4 w20: v1(1270,320) C12.1@1270,260.72 C11.1@1332.28,260.72 ; C11.1@1339,261.43 1492.63,261.43 ccw(c1492.82,325.69) 1538.3,280.3 ccw(c1504.92,313.46) 1548.44,295.58 ccw(c1513.03,310.12) 1551.31,309.96 cw(c1599.42,310.12) 1568.55,347.02 cw(c1639.48,274.91) 1639.48,376.06 C36.1@1670,376.06 C37.1@1760,376.06 C38.1@1850,376.06 cw(c1850,331.29) 1881.66,362.94 L3.2@1912.6,332
2V8: C33.1 C34.1 C35.1 L2.2 R22.2 U1.80 | length 1324.1
  Layer 1 w7.5: v1(844,737) 865.17,721.23 cw(c860.69,715.22) 866.02,720.5 868.92,717.57 ccw(c874.25,722.85) 871.98,715.7 cw(c865,693) 886.07,703.96 ccw(c892.7,707.47) 887.36,702.2 898.68,690.88 U1.80@918.86,670.7 U1.80@919,670.56 ; U1.80@919.03,670.59 cw(c914.87,664.35) U1.80@920.17,669.65
  Layer 4 w7.5: v1(844,737) 846,739 863.71,739 874.23,749.52 901.64,776.93 903.52,778.24 903.85,778.46 1008.25,868.23 cw(c1013.17,862.57) 1008.36,868.32 1008.7,868.62 cw(c1017.81,854.76) 1016.97,871.33 1029.49,871.33 1168.99,872.59 1182.79,872.59 ccw(c1182.79,925.21) 1220,888 cw(c1258.76,849.24) 1258.76,904.06 C35.1@1677,904.06 ; L2.2@1914.6,860 cw(c1912.95,858.35) 1915.28,858.35 R22.2@1915.28,785
  Layer 4 w20: C35.1@1677,904.06 C33.1@1767,904.06 C34.1@1852,904.06 cw(c1852,859.29) 1883.66,890.94 L2.2@1914.6,860
3V3: C16.1 C17.1 C18.1 C19.1 C20.1 C21.1 C30.1 C31.1 C32.1 C42.1 J1.P4 L1.2 P1.1 P2.30 R1.2 R6.2 R9.2 R10.2 R11.2 R12.2 R13.2 R19.2 U1.4 U1.5 U1.20 U1.50 U1.67 U1.73 U2.3 U2.7 U2.8 U9.1 U9.3 | length 1984.9
  Layer 1 w7.5: C42.1@390,272.28 439.67,272.28 U9.3@439.8,272.42 450.87,272.42 ccw(c450.87,305.13) 474,282 ccw(c461.93,294.07) 479,294.07 479,322 ccw(c454.86,322) 471.93,339.07 471,340 ccw(c453.57,322.57) 453.57,347.22 U9.1@439.8,347.22 391.88,347.22 cw(c391.88,349.88) v1(390,348) ; U1.4@863.19,491.14 887.31,515.26 cw(c906,496.57) v1(906,523) cw(c878.67,523) 897.99,503.67 U1.5@874.32,480 ; v1(956.37,778.14) cw(c956.37,751.69) 975.07,770.39 U1.73@996.81,748.64 ; U1.73@1015.1,730.35 1015.22,730.47 cw(c1010.29,724.83) 1015.56,730.16 U1.73@1017.13,728.59 ; U1.20@1041.36,312.97 v1@1076.96,348.57 ; U1.67@1063.63,815.46 cw(c1079.42,799.66) 1079.42,822 v1(1092,822) ; v1@1261.98,600.41 U1.50@1298.86,637.29 ; U2.8@1496.3,744 U2.7@1496.3,794 v1(1575,794) ; v1(1718,843) 1781.29,843 ccw(c1781.29,846.41) U2.3@1783.7,844 1847.34,844 cw(c1847.34,830.34) 1857,840 cw(c1847.34,830.34) 1861,830.34 R6.2@1861,780.72 ; R1.2@2620,487.72 2660.72,487.72 v1(2661,488)
  Layer 1 w10: v1@1076.96,348.57 cw(c1078,347.52) v1(1078,349) ; v1(1261,600) ccw(c1261,601.39) v1@1261.98,600.4 ; J1.P4@2070,669.92 2083.07,669.92 ccw(c2083.07,769.92) 2153.78,699.21 C21.1@2165,710.43 2196.67,710.43 cw(c2196.67,708.95) v3(2197.72,710) ; R12.2@2197.72,573.15 R13.2@2197.72,618.15 R9.2@2197.72,663.15 v3(2197.72,710) ; R11.2@2197.72,838.15 R10.2@2197.72,793.15 v3(2197.72,710)
  Layer 4 w7.5: L1.2@520,467.6 591.01,467.6 cw(c591.01,458.73) R19.2@597.28,465 ; v1(1261,600) C20.1@1261,637.28
  Layer 4 w10: C19.1@1039.72,350 ccw(c1042.13,352.41) 1042.13,349 v1(1078,349)
  Layer 4 w20: C16.1@1010,909.06 1080,909.06 ccw(c1080,912.28) C17.1@1082.28,910 1082.28,941.72 v1(1082,942)
  Layer 4 w30: v1(450,400) ccw(c464.35,414.35) 464.35,394.06 C32.1@520,394.06 ; L1.2@520,467.6 C32.1@520,394.06 ; C18.1@795,394.06 C31.1@705,394.06 C30.1@615,394.06 C32.1@520,394.06
5V: C22.1 C23.1 C26.1 C27.1 C28.1 C29.1 J2.A4B9 J2.A9B4 J3.A4B9 J3.A9B4 P1.30 P2.1 U4.7 U4.8 U5.1 U5.4 U6.1 U6.4 U7.1 U7.4 U8.1 U8.4 | length 8691.1
  Layer 1 w7.5: J2.A9B4@297.34,447.26 ccw(c297.52,454.75) 297.52,447.25 J2.A9B4@297.77,447.25 ; U4.7@2587.44,714.06 2587.44,732.45 ccw(c2565.45,732.45) 2581,748 ccw(c2570.28,737.28) 2570.28,752.44 U4.8@2549.06,752.44 2549.06,767.41 cw(c2596.49,767.41) 2562.95,800.95 2600.17,838.17 2600.17,851.11 C23.1@2619.06,870 ccw(c2650.57,870) 2628.28,847.72 2650,826 ccw(c2677.6,853.6) 2677.6,814.57 C22.1@2700,814.57 2700,789.73 ccw(c2730.73,789.73) 2709,768 ccw(c2731.93,790.93) 2731.93,758.5 J3.A9B4@2783.3,758.5
  Layer 1 w20: 200.74,450.2 cw(c214.75,436.18) 214.75,456 254,456 256.1,455.89 ccw(c257.05,475.87) 256.38,455.88 cw(c255.88,438.02) 262.86,454.47 267.05,452.73 cw(c260.22,436.22) 269.79,451.31 ccw(c280.39,468.27) 272.54,449.88 ccw(c289.19,489.19) 289.19,446.5 J2.A9B4@321.52,446.5 ; 250.77,618.99 250.77,619.33 253.86,620.7 cw(c261.97,602.41) 253.91,620.72 283.06,633.5 J2.A4B9@321.52,633.5 ; J3.A4B9@2783.3,571.5 2807.05,571.5 2807.29,571.5 2823.13,571.5 ccw(c2823.13,586.87) 2834,576 cw(c2850.9,559.1) 2850.9,583 2884,583 ; J3.A9B4@2783.3,758.5 2807.4,758.5 cw(c2807.4,712.4) 2840,745 ccw(c2849.66,754.66) 2849.66,741 2902,741
  Layer 1 w30: P2.1@100,100 169.71,169.71 ccw(c99,240.42) 199,240.42 199,601.42 216.57,618.99 250.77,618.99 ; 200.74,450.2 200.74,456 ; 2884,583 2902,601 2902,741 2902,860.58 cw(c3002,860.58) 2931.29,931.29 P1.30@3000,1000
  Layer 4 w10: U5.4@522.6,721.18 ccw(c548.62,721.18) 530.22,702.78 585.54,647.46 cw(c556.89,618.82) U5.1@597.4,618.82 ; U6.1@2030.82,747.6 ccw(c2030.82,785.69) 2057.76,758.76 2113.07,814.07 cw(c2133.18,793.96) U6.4@2133.18,822.4 ; U7.1@2033.82,219.6 ccw(c2033.82,257.69) 2060.76,230.76 2116.07,286.07 cw(c2136.18,265.96) U7.4@2136.18,294.4 ; U8.1@2033.82,479.6 ccw(c2033.82,515.28) 2059.05,490.05 2114.37,545.37 cw(c2136.18,523.55) U8.4@2136.18,554.4
  Layer 4 w20: 37,794 ccw(c46.66,803.66) 46.66,790 C26.1@520,790 cw(c513.73,783.73) 522.6,783.73 U5.4@522.6,721.18 ; U6.4@2133.18,822.4 2192.15,822.4 cw(c2192.15,814.2) C27.1@2197.94,820 ; U7.4@2136.18,294.4 C28.1@2195.15,294.4 ; U8.4@2136.18,554.4 C29.1@2195.15,554.4 ; C28.1@2192.15,272.4 cw(c2192.15,264.2) C28.1@2197.94,270 ; C29.1@2192.15,532.4 cw(c2192.15,524.2) C29.1@2197.94,530
  Layer 4 w30: P2.1@100,100 66.29,133.71 cw(c137,204.42) 37,204.42 37,794 37,1044 59,1066 2974,1066 2995.91,1044.09 2995.91,1004.09 P1.30@3000,1000 3000,984.28 cw(c2931.72,984.28) 2980,936 cw(c2948.62,967.38) 2948.62,923 2301.11,923 ccw(c2301.11,819.7) 2228.07,892.75 ccw(c2300.84,820) C27.1@2200.02,840.57 ; C27.1@2197.94,820 ccw(c2234.03,820) 2208.51,794.49 2246,757 cw(c2229.1,740.1) 2253,740.1 2253,645.48 cw(c2153,645.48) 2223.71,574.77 C29.1@2200.94,552 2222.71,530.23 cw(c2152,459.52) 2252,459.52 2252,369.56 cw(c2214.44,369.56) 2241,343 2208.68,310.68 ccw(c2227.37,292) C28.1@2200.94,292
AW_CC1: J2.A5 Q1.3 R7.1 | length 137.2
  Layer 1 w5: J2.A5@321.52,589.21 388.78,589.21 ccw(c388.78,626.04) R7.1@414.82,600 Q1.3@455.82,600
AW_CC2: J2.B5 Q2.3 R8.1 | length 135.9
  Layer 1 w5: J2.B5@321.52,471.1 401.65,471.1 cw(c401.65,459.54) R8.1@409.82,467.72 449.26,467.72 cw(c449.26,458.44) Q2.3@455.82,465
AWUSB_ID: P1.21 R31.1 R32.1 U1.47 | length 2307.9
  Layer 1 w5: R32.1@579.82,467.28 588.15,475.38 ccw(c584.84,479.13) 588.29,475.51 595.62,482.63 cw(c599.12,479.07) 596.34,483.22 ccw(c590.65,491.89) 599.3,486.17 cw(c603.45,483.38) 599.89,486.89 605.88,492.88 ccw(c600.76,498) 608,498 608,569 ; R31.1@579.82,602.28 604.39,577.71 cw(c595.68,569) 608,569 ; v1(663,569) 608,569 ; U1.47@1332.27,603.88 1350.69,622.3 cw(c1369.42,603.62) 1366.01,629.85 1374.6,629.85 1375.71,629.73 ccw(c1399.03,735.99) 1387.19,627.85 1393.76,627.5 1404.68,627.5 1420.99,627.64 cw(c1420.99,607.44) 1435.28,621.72 1468.3,588.7 v1(1479.5,577.47)
  Layer 2 w5: v1(663,569) 793.64,569 ccw(c793.64,654.36) 854,594 1002.71,742.71 cw(c1116.88,628.54) 1116.88,790 1200.09,790 cw(c1200.09,628.54) 1314.26,742.71 v1(1479.5,577.47) 1480.5,577.37 1492.41,577.37 ccw(c1492.41,596.59) 1506,583 ccw(c1493.93,595.07) 1511,595.07 1511,714.93 cw(c1528.07,714.93) 1516,727 cw(c1540.14,702.86) 1540.14,737 1871.2,737 ccw(c1871.2,784.8) 1905,751 ccw(c1868.79,787.21) 1920,787.21 1920,888.44 cw(c1957.56,888.44) 1931,915 1946.51,930.51 cw(c1967,910.03) 1967,939 1997.58,939 ccw(c1997.58,1039) 2068.29,968.29 P1.21@2100,1000
AWUSB_N: J2.A7 J2.B7 U1.68 | length 987.6
  Layer 1 w5: J2.A7@321.52,530.16 374.84,530.16 375,530 377.29,532.29 cw(c379,530.59) v1(379,533) 379,557.76 ccw(c368.76,557.76) 375.98,565.02 ccw(c365.07,554.07) 365.07,569.53 360.77,569.53 J2.B7@321.52,569.53 ; v1@1025.01,847.54 1027.25,837.84 1029.13,829.71 1030.87,825.95 1033.8,823.02 U1.68@1052.49,804.32
  Layer 2 w5: v1(379,533) 410.51,533 cw(c410.51,512.51) 425,527 ccw(c440.69,542.69) 440.69,520.5 485.58,520.5 532.86,533.91 542.21,540.15 ccw(c539.4,544.29) 542.49,540.35 ccw(c485.58,612) 550.3,547.33 829.65,826.68 cw(c910.03,746.42) 910.03,860 930.44,860 cw(c930.44,838.95) 945.16,854 cw(c930.44,838.95) 945.31,853.86 955.54,847.01 961.11,845.7 962.56,845.7 973.02,846.09 ccw(c972.17,868.58) 976.62,846.52 987.22,848.66 987.83,849.06 cw(c1002,831.58) 990.83,851.12 991.66,851.7 ccw(c975.59,870.2) 992,852 cw(c998.32,845.04) 998.26,854.44 ccw(c998.24,859.44) 998.64,854.46 cw(c1000.96,830.26) 1004.92,854.25 1008.69,853.08 cw(c1002.05,831.58) 1009.24,852.9 v1(1025.04,847.58)
AWUSB_P: J2.A6 J2.B6 U1.69 | length 983.6
  Layer 1 w5: J2.A6@321.52,549.84 284.45,549.84 ccw(c284.45,543.55) 280,548 ccw(c284.83,543.17) 278,543.17 278,524.44 278,516.83 ccw(c284.83,516.83) 279.98,512.02 ccw(c283.69,515.69) 283.69,510.47 292.62,510.47 J2.B6@321.52,510.47 407.53,510.47 v1(408,510) ; v1@1009.54,825 1016.62,817.92 U1.69@1041.36,793.19
  Layer 2 w5: v1(408,510) 480.75,510 ccw(c480.75,616.83) 556.29,541.29 835.71,820.71 cw(c906.42,750) 906.42,850 926.1,850 cw(c926.1,826.1) 943,843 ccw(c970.56,870.56) 970.56,831.58 v1(1002.05,831.58)
CP2102_DTR: C1.1 C24.2 P2.28 R1.1 SW1.A SW1.A' U1.70 | length 4541.9
  Layer 1 w5: v1(972.17,868.58) 972.17,834.65 ccw(c1000.04,838.77) 988.14,813.23 1004.83,805.41 1010.04,802.23 U1.70@1030.22,782.05 ; C24.2@2540,452.28 C1.1@2580,452.28 R1.1@2620,452.28 ; R1.1@2621,451 2621,398 ; P2.28@2800,100 2733.14,166.86 ccw(c2687,120.82) 2687,186 2683.42,186 cw(c2683.46,247.46) 2640,204 cw(c2685.87,249.87) 2621,249.87 2621,398 ; SW1.A'@2993.86,398.74 SW1.A@2726.14,398.74 2622.79,398.74 ccw(c2622.79,396.21) 2621,398
  Layer 2 w5: v1(972.17,868.58) 961.02,885.71 cw(c1046,938.42) 946,938.42 946,1000.2 cw(c993.8,1000.2) 960,1034 cw(c1001.04,992.96) 1001.04,1051 3016.62,1051 cw(c3016.62,1006.62) 3048,1038 cw(c3023.86,1013.86) 3058,1013.86 3058,89.8 cw(c3010.2,89.8) 3044,56 cw(c3022.27,77.73) 3022.27,47 2889,47 cw(c2889,133.91) 2829.37,70.68 2829.32,70.73 cw(c2832.78,74.34) 2829.25,70.8 P2.28@2800,100
CP2102_RXD: P1.20 R18.2 U1.48 | length 1858.3
  Layer 1 w5: U1.48@1321.14,615.02 1345.76,639.64 cw(c1359.35,626.1) 1359.38,645.29 cw(c1359.34,605.46) 1377.33,640.99 1377.7,640.82 ccw(c1397.12,688.27) 1397.14,637 1426.01,637.25 cw(c1426.01,594.4) 1456.3,624.7 cw(c1426.01,594.4) 1456.35,624.65 1457.86,623.14 1459.16,621.16 ccw(c1463.59,623.48) 1459.43,620.71 1459.53,620.56 cw(c1455.43,617.7) 1459.67,620.36 ccw(c1478.63,632.47) 1465.57,614.15 1466.21,613.72 ccw(c1478.62,632.49) 1469.11,612.1 v1(1484.27,605.06) ; P1.20@2000,1000 2035.71,964.29 ccw(c2106.42,1035) 2106.42,935 2190.58,935 cw(c2190.58,835) 2261.29,905.71 2264.03,902.97 cw(c2188.58,825) 2265.01,902.01 cw(c2188.58,825) 2265.34,901.68 2268.98,898.04 cw(c2207.47,836.47) 2269.29,897.73 2273.77,893.25 cw(c2222.53,842) 2295,842 2295,539.97 ccw(c2355.51,539.97) 2312.7,497.21 ccw(c2330.07,514.54) 2330.07,490 ; 2330.1,490 R18.2@2453.28,490
  Layer 2 w5: v1(1484.27,605.06) 1498.21,619.4 ccw(c1482.52,630.09) 1501.15,633.78 cw(c1506.06,634.69) 1501.06,634.63 ; 1501.06,634.68 1501,700 1501,714.69 cw(c1528.31,714.69) 1509,734 cw(c1537.97,705.03) 1537.97,746 1869.44,746 ccw(c1869.44,783.56) 1896,757 1902.51,763.51 ccw(c1882.03,784) 1911,784 1911,893.11 ; 1911,893.14 cw(c1954.07,893.16) 1923.64,923.64 P1.20@2000,1000